# Altium PCB PiModulos V2 - Copy.PcbDoc
Units mil, origin at the board's own origin, x right, y up, seen from the top; angles counter-clockwise.
Board outline 2605 x 1245 mil, 2 copper layers (Top Layer, Bottom Layer); 57 components, 38 nets, 134 pads, 0 vias.
Unrouted connection lines stored in the file: 90.
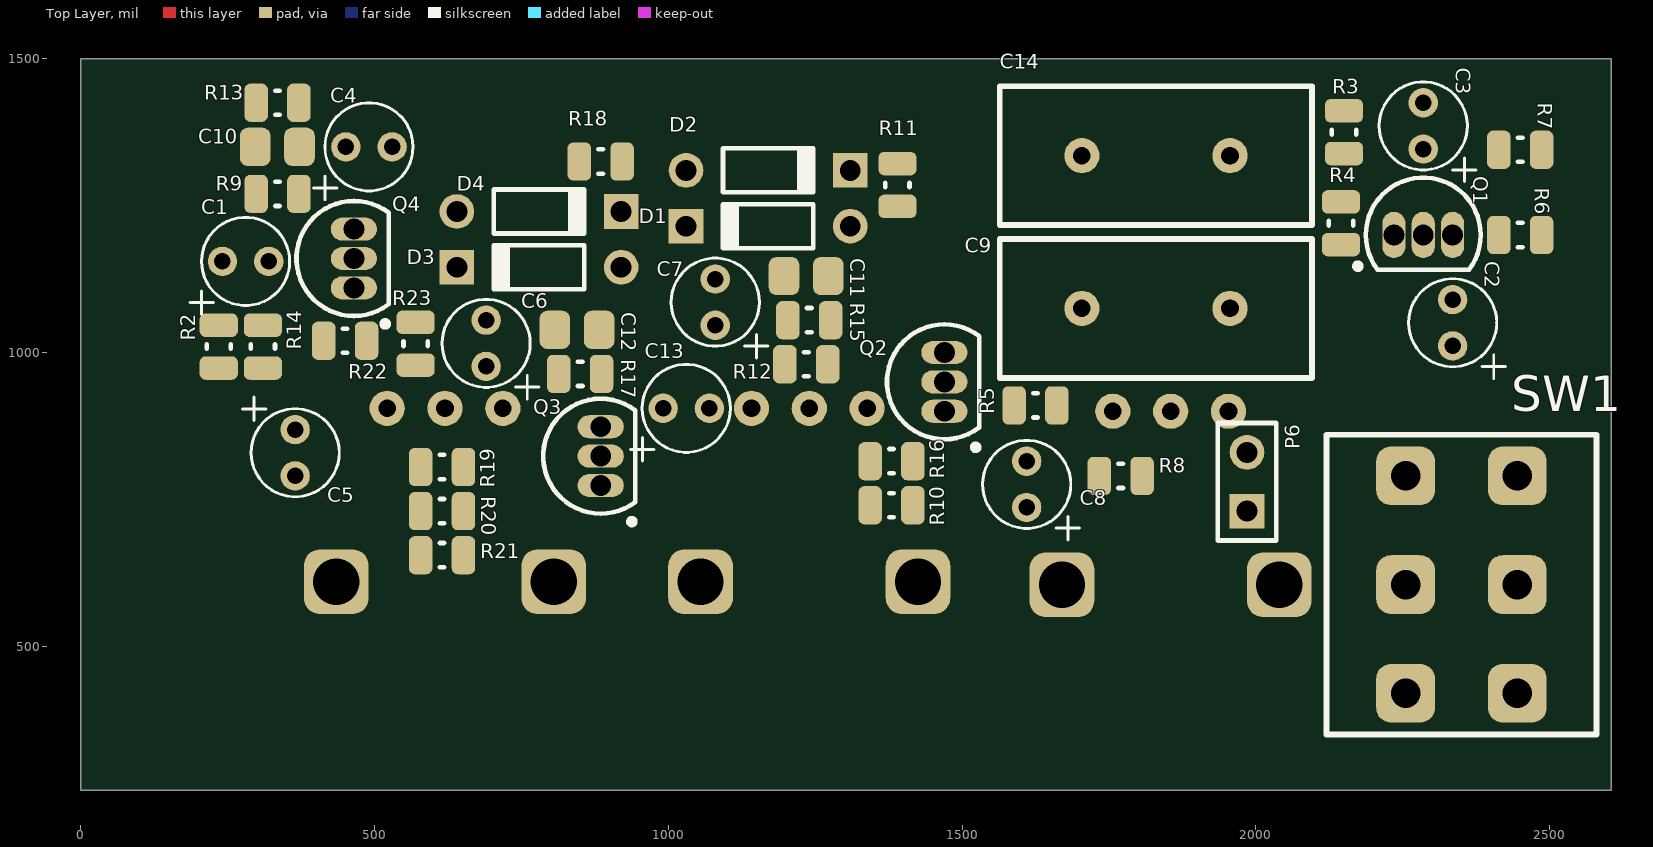
[diagram p0: Top Layer view]
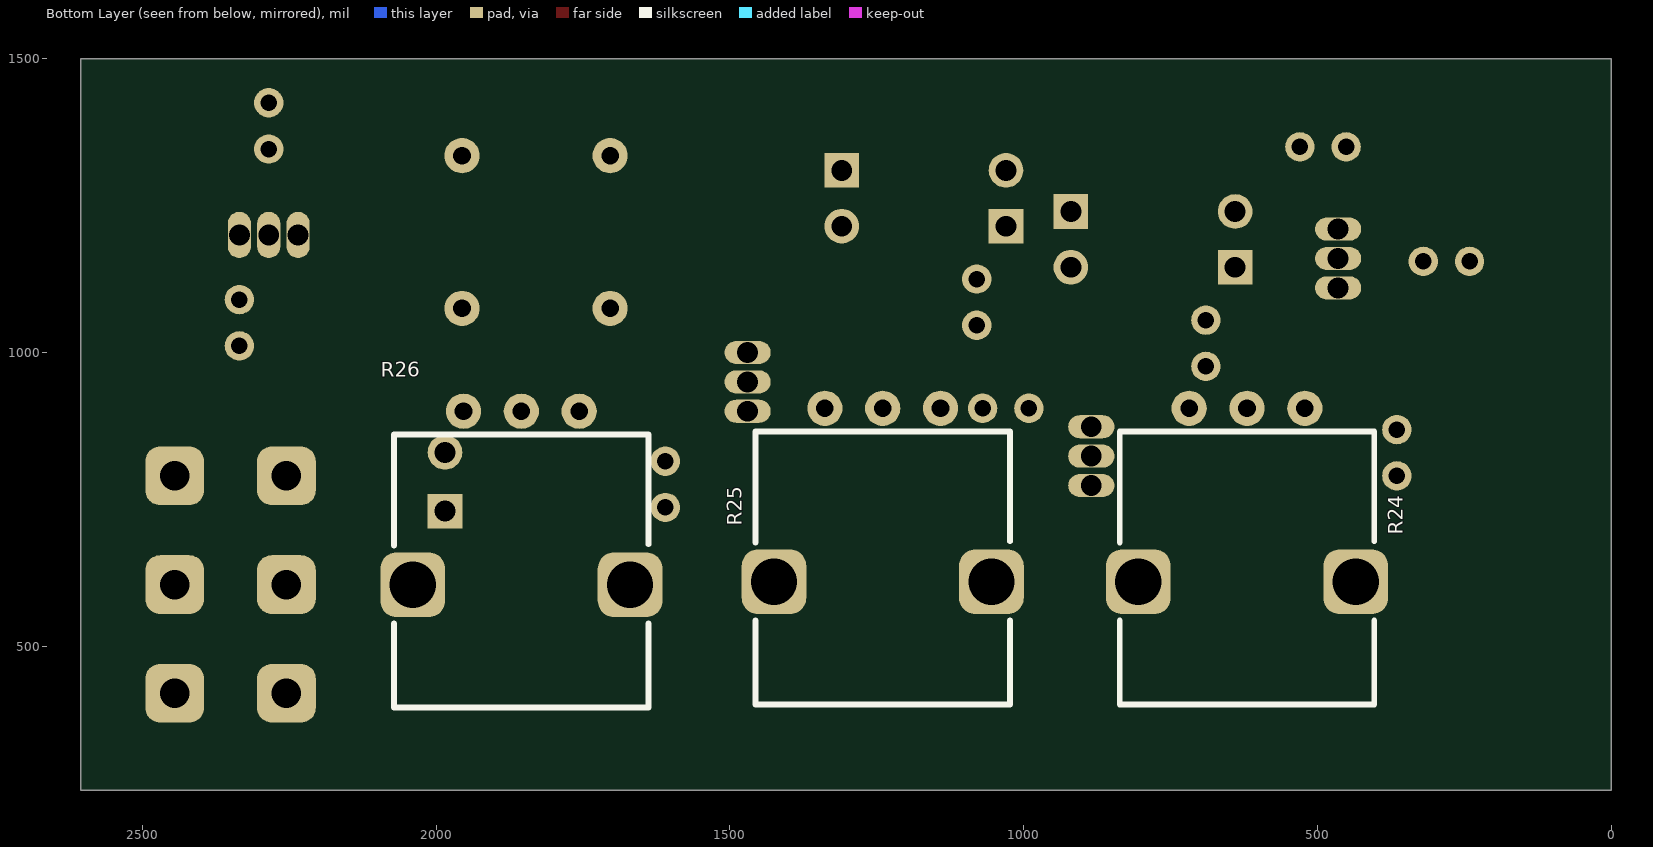
[diagram p1: Bottom Layer view, seen from below]

## Layer stack, top to bottom
Top Solder: solder mask 0.4, Solder Resist, Dk 3.5
Top Layer: signal copper 1.4
Dielectric 1: dielectric 12.6, FR-4, Dk 4.8
Bottom Layer: signal copper 1.4
Bottom Solder: solder mask 0.4, Solder Resist, Dk 3.5

## Board outline
0,255 2605,255 2605,1500 0,1500

## Design rules (kind name [scope] priority, off if disabled: settings)
Clearance [All] p1: gap=10
Height [All] p1: minheight=0 maxheight=6000 prefheight=500
PolygonConnect [All] p1: connectstyle=Relief reliefconductorwidth=10 reliefentries=4 polygonreliefangle="90 Angle" airgapwidth=10
RoutingVias [All] p1: holewidth=28 width=50 viastyle="Through Hole" minholewidth=28 minwidth=50 maxholewidth=28 maxwidth=50
SolderMaskExpansion [All] p1: expansion=4
Width [All] p1: maxlimit=10 minlimit=10 preferedwidth=10
29 further rules are at their usual default settings.

## Components (designator, comment, footprint, x,y, rotation, side; value= is the part's Value field where it differs from the comment)
C1 "0.1uF" 5X12.5mmCAP 320,1155 r180 top
C2 "0.1uF" 5X12.5mmCAP 2335,1090 r270 top
C3 "0.1uF" 5X12.5mmCAP 2285,1425 r270 top
C4 "0.1uF" 5X12.5mmCAP 530,1350 r180 top
C5 "0.1uF" 5X12.5mmCAP 365,790 r90 top
C6 "0.1uF" 5X12.5mmCAP 690,1055 r270 top
C7 "0.1uF" 5X12.5mmCAP 1080,1125 r270 top
C8 "0.1uF" 5X12.5mmCAP 1610,815 r270 top
C9 "4000pF" 30LVD40-R 1830,1075 r90 top
C10 "560pF" C0805 335,1350 r180 top
C11 "560pF" C0805 1235,1130 r180 top
C12 "560pF" C0805 845,1038.58 r180 top
C13 "0.1uF" 5X12.5mmCAP 1070,905 r180 top
C14 "4000pF" 30LVD40-R 1830,1335 r90 top
D1 "1N914BTR" DO-35 1170,1215 r180 top
D2 "1N914BTR" DO-35 1170,1310 r0 top
D3 "1N914BTR" DO-35 780,1145 r180 top
D4 "1N914BTR" DO-35 780,1240 r0 top
P1 "Header 2" HDR1X2 -129.58,1550 r90 top
P3 "Header 2" HDR1X2 2855,1960 r90 top
P4 "Header 3" HDR1X3 -785,680 r90 top
P5 "Header 3" HDR1X3 3200,1860 r90 top
P6 "Header 2" HDR1X2 1985,730 r90 top
P7 "Header 2" HDR1X2 4875,2700 r90 top
P8 "Header 3" HDR1X3 2545,2600 r90 top
Q1 "2N3904" TO-92A 2285,1200 r270 top
Q2 "2N3904" TO-92A 1470,950 r0 top
Q3 "2N3904" TO-92A 885,823.58 r0 top
Q4 "2N3904" TO-92A 465,1160 r0 top
R1 "1.2K" R0805 -294.58,1665 r0 top
R2 "33K" R0805 235,1010 r270 top
R3 "100K" R0805 2150,1375 r270 top
R4 "2.7K" R0805 2145,1220 r90 top
R5 "33K" R0805 1625,910 r180 top
R6 "10K" R0805 2450,1200 r0 top
R7 "390K" R0805 2450,1345 r0 top
R8 "33K" R0805 1770,790 r180 top
R9 "470K" R0805 335,1270 r180 top
R10 "100r" R0805 1380,740 r0 top
R11 "18K" R0805 1390,1285 r270 top
R12 "8.2K" R0805 1235,980 r180 top
R13 "18K" R0805 335,1425 r0 top
R14 "100K" R0805 310,1010 r90 top
R15 "470K" R0805 1240,1055 r180 top
R16 "100K" R0805 1380,815 r0 top
R17 "470K" R0805 850,963.58 r180 top
R18 "10K" R0805 885,1325 r180 top
R19 "8.2K" R0805 615,805 r180 top
R20 "100K" R0805 615,730 r0 top
R21 "100r" R0805 615,655 r0 top
R22 "100r" R0805 450,1020 r0 top
R23 "1.2K" R0805 570,1015 r90 top
R24 "100K" P0915N-FC15BR100K 620,905 r0 bottom
R25 "100K" P0915N-FC15BR100K 1240,905 r0 bottom
R26 "100K" P0915N-FC15BR100K 1855,900 r0 bottom
R27 "150K" R0805 3215,780 r90 top
SW1 "100DP1T1B1M2QEH" 100DP1T1B1M2QEH 2350,605 r0 top

## Footprints (in the part's own frame and the unit in brackets; to place one, negate y for a bottom-side part, rotate by r counter-clockwise, add the part's x,y. Pads: shape width x height; smd on the part's side, far side on the other; paste and mask are expansions set on the pad)
5X12.5mmCAP [mil]
  round 50 hole 28: 1(0,0) 2(78.74,0)
  silkscreen extent -36,-75 134,90, body extent -35,-75 115,75, height 492
30LVD40-R [mil] "Ceramic Disc Capacitor Throughhole"
  round 60 hole 30: 1(0,125.98) 2(0,-125.98)
  silkscreen extent -118,-266 118,266
100DP1T1B1M2QEH [mm] "100DP1T1B1M2QEH"
  rrect50% 2.54x2.54 hole 1.27: 1(-2.415,4.7) 2(-2.415,0) 3(-2.415,-4.7) 4(2.415,-4.7) 5(2.415,0) 6(2.415,4.7)
  silkscreen extent -5.84,-6.48 5.84,6.48, body extent -5.72,-6.35 5.71,6.35, height 30.15
C0805 [mil]
  rrect50% 52x65 smd: 1(-37.4,0) 2(38,0)
  body extent -40,-30 40,30, height 35
DO-35 [mm] "Diode, Axial; Body 3.8 x 1.9 mm (LxDia. max), Lead Dia. 0.53 mm (max)"
  round 1.5 hole 0.9: 1(-3.55,0)
  rect 1.5x1.5 hole 0.9: 2(3.55,0)
  silkscreen extent -1.95,-0.95 2.05,0.95
HDR1X2 [mm] "Connector; Header; 2 Position"
  rect 1.5x1.5 hole 0.9: 1(0,0)
  round 1.5 hole 0.9: 2(2.54,0)
  silkscreen extent -1.27,-1.27 3.81,1.27
HDR1X3 [mm] "Connector; Header; 3 Position"
  rect 1.5x1.5 hole 0.9: 1(0,0)
  round 1.5 hole 0.9: 2(2.54,0) 3(5.08,0)
  silkscreen extent -1.27,-1.27 6.35,1.27
P0915N-FC15BR100K [mm] "Vertical PCB Mounted Potentiometer Single Gang"
  rrect50% 2.8x2.8 hole 2: 0(-4.7,7.5) 0(4.7,7.5)
  round 1.524 hole 0.762: 1(-2.5,0) 2(0,0) 3(2.5,0)
  silkscreen extent -5.5,1 5.5,12.8
R0805 [mil]
  rrect50% 40x65 smd: 1(-36.42,0) 2(36.42,0)
  silkscreen extent -4,-21 4,21, body extent -43,-28 43,28, height 20
TO-92A [mm] "TO, Flat Index; 3 In-Line, Axial Leads; Body Dia. 4.5mm; Leads 0.51 x 0.48 mm (max)"
  oval 2x1 hole 0.9: 1(0,-1.27) 2(0,0) 3(0,1.27)
  silkscreen extent -2.48,-2.95 1.5,2.48, body extent -2.48,-2.5 1.5,2.5, height 6.86

## Part data
C1 C2 C3 C4 C5 C6 C7 C8 C13: library part UFG2A0R1MDM1TD, "CAP ALUM 0.1UF 20% 100V RADIAL"
C9 C14: library part 30LVD40-R, "Ceramic Disc Capacitors .25LS 4000PF 300V 20%"
C10 C11 C12: library part CL21C561JBANNNC, "560pF ±5% 50V C0G, NP0 Ceramic Capacitor -55°C ~ 125°C Surface Mount, MLCC 0805 (2012 Metric) 0.079\" L x 0.049\" W (2.00mm x 1.25mm"
D1 D2 D3 D4: "DIODE GEN PURP 100V 200MA DO35"
P1 P3 P6 P7: "Header, 2-Pin"
P4 P5 P8: "Header, 3-Pin"
Q1 Q2 Q3 Q4: library part 2N3904TF, "TRANS NPN 40V 0.2A TO-92"
R1 R23: library part ERJ-6ENF1201V, "RES SMD 1.2K OHM 1% 1/8W 0805"
R2 R5 R8: library part ERJ-6ENF3302V, "RES SMD 33K OHM 1% 1/8W 0805"
R3 R14 R16 R20: library part ERJ-6ENF1003V, "RES SMD 100K OHM 1% 1/8W 0805"
R4: library part RC2012F272CS, "RES SMD 2.7K OHM 1% 1/8W 0805"
R6 R18: library part ERJ-6ENF1002V, "RES SMD 10K OHM 1% 1/8W 0805"
R7: library part ERJ-6ENF3903V, "RES SMD 390K OHM 1% 1/8W 0805"
R9 R15 R17: library part ERJ-6ENF4703V, "RES SMD 470K OHM 1% 1/8W 0805"
R10 R21 R22: library part CRCW0805100RFKEA, "RES SMD 100 OHM 1% 1/8W 0805"
R11 R13: library part ERJ-6ENF1802V, "RES SMD 18K OHM 1% 1/8W 0805"
R12 R19: library part RC2012F822CS, "RES SMD 8.2K OHM 1% 1/8W 0805"
R24 R25 R26: library part P0915N-FC15BR100K, "POT 100K OHM 1/20W PLASTIC LIN"
R27: library part RC2012F154CS, "RES SMD 150K OHM 1% 1/8W 0805"
SW1: "SWITCH TOGGLE DPDT 5A 120V"

## Nets (pads, with @x,y where several pads share a name; then routed paths per layer and width w, separated by ;. In a path a pad name is that pad's centre, name@x,y a point inside that pad or via, vN(x,y) a via of type N, cw(c..) or ccw(c..) an arc to the next point about the centre after c; other vN are vias at no path point)
9VCC: P3.2 R1.1 R6.2 R7.2 R11.1 R13.1 R18.2
GND: C8.2 P1.1 P7.2 P8.1 R3.1 R4.1 R5.2 R10.1 R14.1 R16.1 R20.1 R21.1 R22.1 R23.2 R26.3
NetC1_1: C1.1 C10.2 Q4.2 R9.2 R14.2
NetC1_2: C1.2 R2.1
NetC2_1: C2.1 Q1.3 R6.1
NetC2_2: C2.2 R26.1
NetC3_1: C3.1 SW1.5
NetC3_2: C3.2 Q1.2 R3.2 R7.1
NetC4_1: C4.1 R24.1
NetC4_2: C4.2 C10.1 Q4.3 R9.1 R13.2
NetC5_1: C5.1 R19.2
NetC5_2: C5.2 R24.2
NetC6_1: C6.1 D3.2 D4.1
NetC6_2: C6.2 C12.2 Q3.2 R17.2 R19.1 R20.2
NetC7_1: C7.1 D1.2 D2.1
NetC7_2: C7.2 C11.2 Q2.2 R12.1 R15.2 R16.2
NetC8_1: C8.1 R8.1 R25.3
NetC9_1: C9.1 P6.1 R5.1 R25.1
NetC9_2: C9.2 C14.2 R8.2 SW1.3
NetC11_1: C11.1 D1.1 D2.2 Q2.3 R11.2 R15.1 SW1.2
NetC12_1: C12.1 C13.2 D3.1 D4.2 Q3.3 R17.1 R18.1
NetC13_1: C13.1 R12.2
NetC14_1: C14.1 P6.2
NetP1_2: P1.2 R1.2
NetP3_1: P3.1 P8.3
NetP4_1: P4.1 P5.3
NetP4_2: P4.2 P8.2
NetP4_3: P4.3 R2.2
NetP5_1: P5.1 R26.2
NetP5_2: P5.2 P7.1
NetQ1_1: Q1.1 R4.2
NetQ2_1: Q2.1 R10.2
NetQ3_1: Q3.1 R21.2
NetQ4_1: Q4.1 R22.2
NetR23_1: R23.1 R24.3
NetR25_2: R25.2 SW1.4
NetR27_1: R27.1 SW1.6
NetR27_2: R27.2 SW1.1
pads on no net: R24.0 R25.0 R26.0

## Silkscreen, mask and mechanical layers (free items; w line width, h text height)
Mechanical 15:
  the board outline again, w10